# Altium PCB PCB1.PcbDoc
Units mm, origin at the board's own origin, x right, y up, seen from the top; angles counter-clockwise.
Board outline 49.91 x 65.28 mm, 4 copper layers (Top Layer, Layer 1, Layer 2, Bottom Layer), stack 0.603 mm thick; 73 components, 88 nets, 357 pads, 0 vias.
Unrouted connection lines stored in the file: 222.
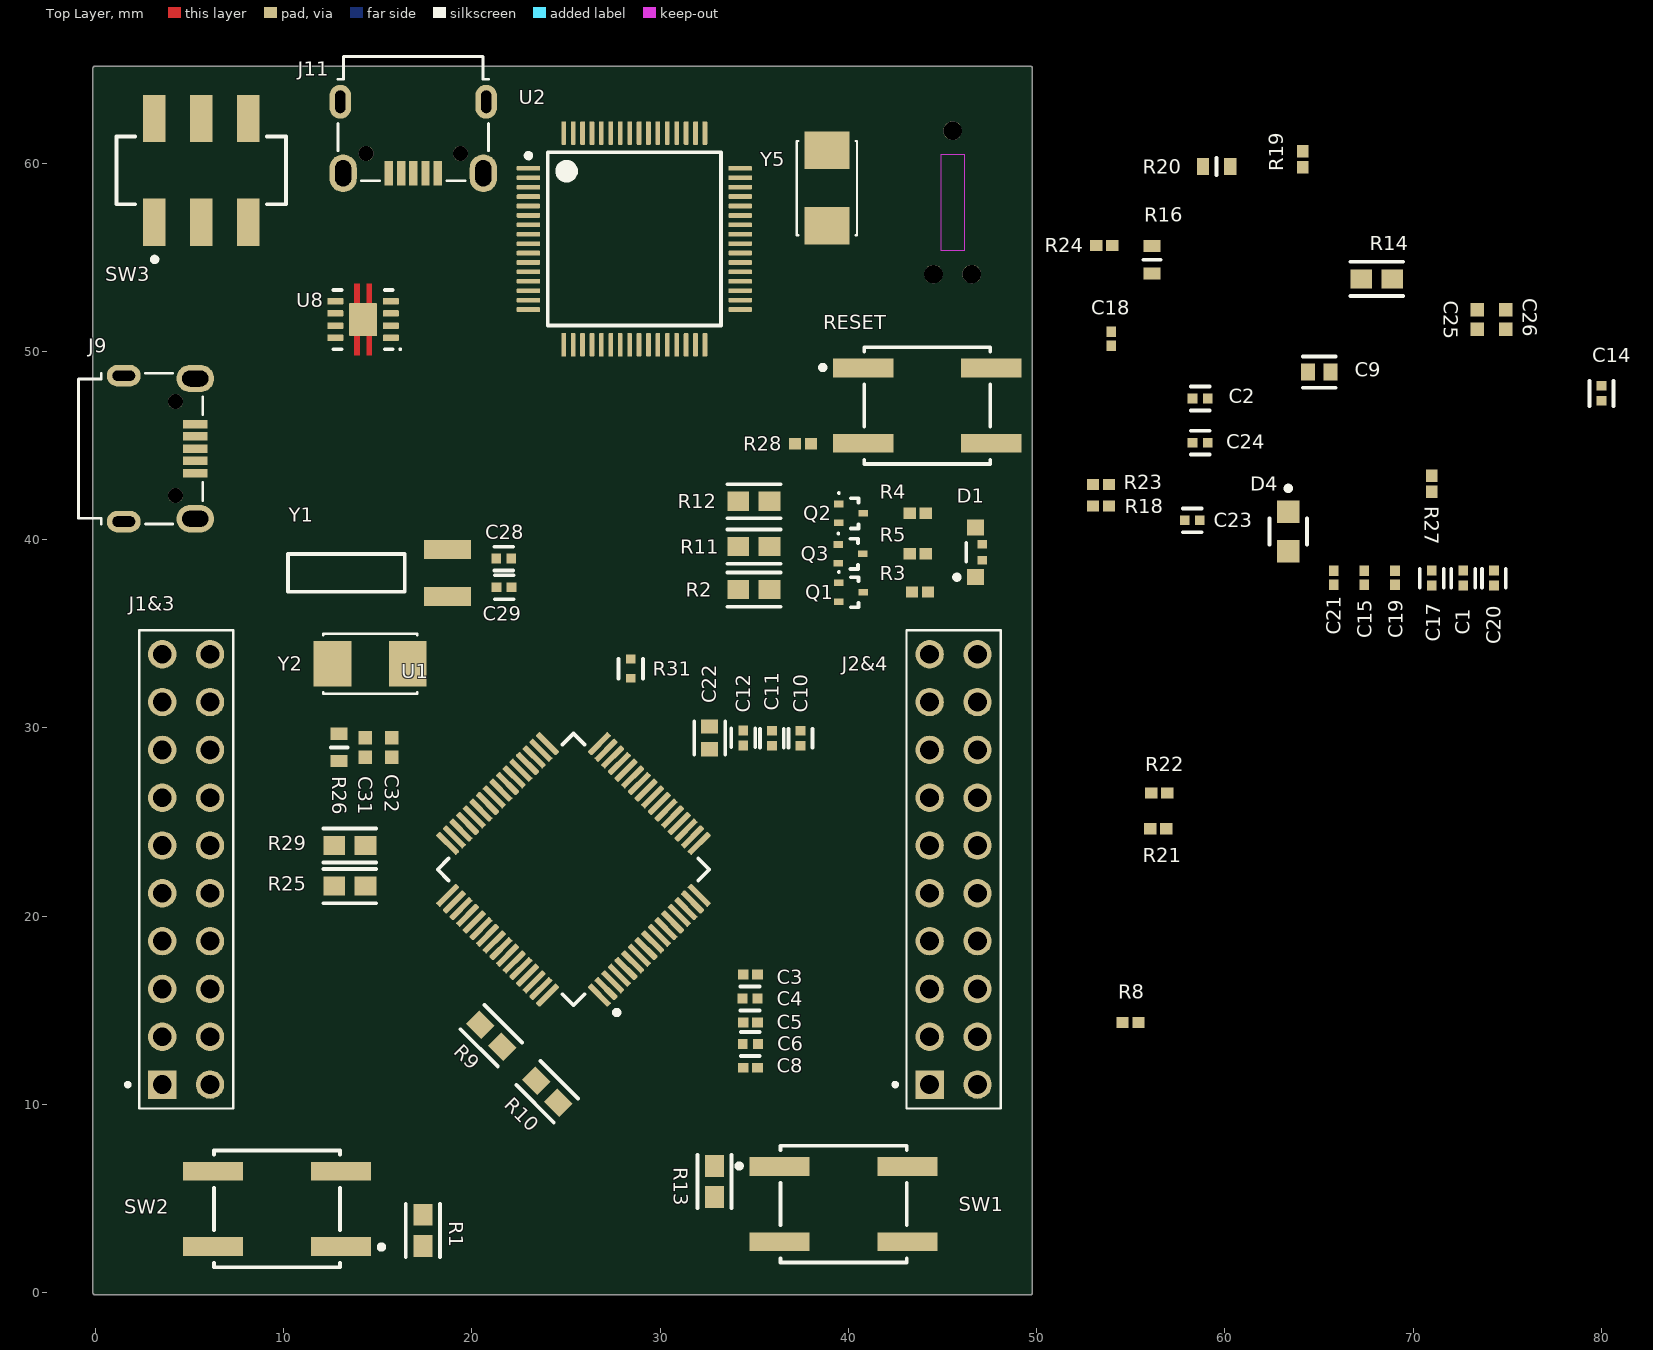
[diagram p0: Top Layer view]
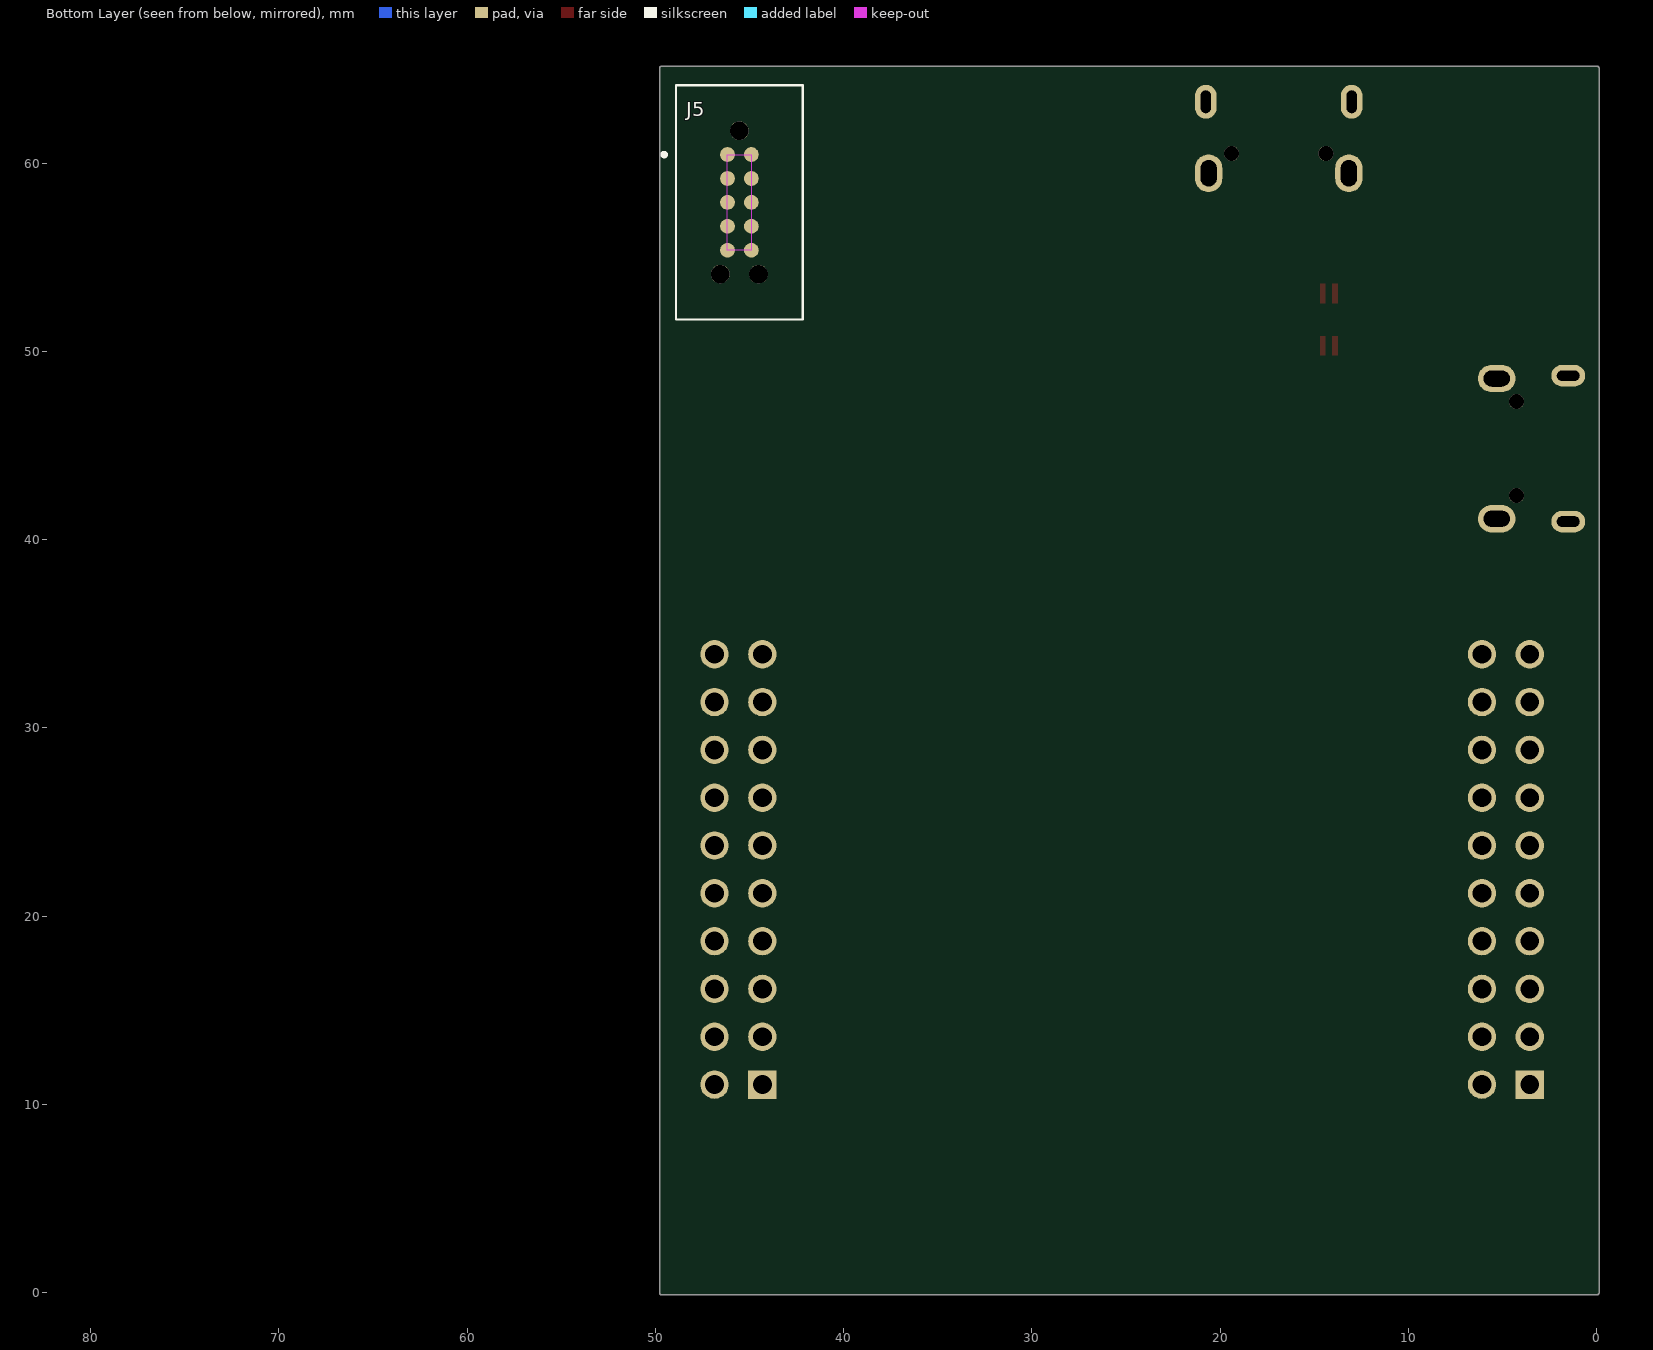
[diagram p1: Bottom Layer view, seen from below]

## Layer stack, top to bottom
Top Solder: solder mask 0.0102, Solder Resist, Dk 3.5
Top Layer: signal copper 0.0356
Dielectric 2: prepreg 0.0711, PP-006, Dk 4.1
Layer 1: signal copper 0.035
Dielectric 1: dielectric 0.32, FR-4, Dk 4.8
Layer 2: signal copper 0.035
Dielectric 3: prepreg 0.0711, PP-006, Dk 4.1
Bottom Layer: signal copper 0.0356
Bottom Solder: solder mask 0.0102, Solder Resist, Dk 3.5

## Board outline
0,-0.127 cw(c0,0) -0.127,0 -0.127,65.024 cw(c0,65.024) 0,65.151 49.657,65.151 cw(c49.657,65.024) 49.784,65.024 49.784,0 cw(c49.657,0) 49.657,-0.127

## Design rules (kind name [scope] priority, off if disabled: settings)
Clearance [All] p1: gap=0.1 ignorepadtopadclearanceinfootprint=FALSE
PolygonConnect [All] p1: connectstyle=Relief reliefconductorwidth=0.254 reliefentries=4 polygonreliefangle="90 Angle" airgapwidth=0.254
RoutingVias [All] p1: holewidth=0.1 width=0.254 viastyle="Through Hole" minholewidth=0.08 minwidth=0.2 maxholewidth=0.125 maxwidth=0.3
SolderMaskExpansion [All] p1: expansion=0.102 istentingtop=FALSE
Width [All] p1: maxlimit=0.254 minlimit=0.254 preferedwidth=0.254
30 further rules are at their usual default settings.

## Components (designator, comment, footprint, x,y, rotation, side; value= is the part's Value field where it differs from the comment)
C1 "0.1uF" FP-C0402-BB-MFG 72.668,37.954 r270 top value="0.10 μF"
C2 "0.1uF" FP-C0402-BB-MFG 58.693,47.498 r0 top value="0.10 μF"
C3 "0.01uF" CAPC1005X55X30LL05T10 34.798,16.891 r180 top
C4 "0.1uF" FP-C0402-BB-MFG 34.779,15.621 r0 top value="0.10 μF"
C5 "0.01uF" CAPC1005X55X30LL05T10 34.798,14.351 r180 top
C6 "0.1uF" FP-C0402-BB-MFG 34.798,13.208 r0 top value="0.10 μF"
C8 "0.01uF" CAPC1005X55X30LL05T10 34.798,11.938 r180 top
C9 "2.2uF" FP-C0603C225K4PACTU-MFG 65.024,48.895 r0 top
C10 "0.1uF" FP-C0402-BB-MFG 37.465,29.445 r90 top value="0.10 μF"
C11 "0.1uF" FP-C0402-BB-MFG 35.941,29.445 r90 top value="0.10 μF"
C12 "0.1uF" FP-C0402-BB-MFG 34.417,29.464 r90 top value="0.10 μF"
C14 "C0402C105K8PACTU" FP-C0402C105K8PACTU-MFG 80.01,47.771 r270 top
C15 "0.01uF" CAPC1005X55X30LL05T10 67.413,37.973 r90 top
C17 "0.1uF" FP-C0402-BB-MFG 70.993,37.954 r270 top value="0.10 μF"
C18 "C0402C103K5RACTU" CAPC1005X55X30LL05T10 53.975,50.672 r270 top
C19 "0.01uF" CAPC1005X55X30LL05T10 69.04,37.973 r90 top
C20 "0.1uF" FP-C0402-BB-MFG 74.295,37.954 r270 top value="0.10 μF"
C21 "0.01uF" CAPC1005X55X30LL05T10 65.786,37.974 r90 top
C22 "2.2uF" FP-C0603C225K4PACTU-MFG 32.639,29.464 r90 top
C23 "0.1uF" FP-C0402-BB-MFG 58.274,41.021 r0 top value="0.10 μF"
C24 "0.1uF" FP-C0402-BB-MFG 58.693,45.149 r0 top value="0.10 μF"
C25 "10pF" CAPC1005X55X25ML05T05 73.406,51.689 r90 top
C26 "10pF" CAPC1005X55X25ML05T05 74.93,51.689 r90 top
C28 "24pF" FP-C0402-BB-MFG 21.698,38.989 r0 top value="24 pF"
C29 "24pF" FP-C0402-BB-MFG 21.717,37.465 r180 top value="24 pF"
C31 "10pF" CAPC1005X55X25ML05T05 14.351,28.954 r90 top
C32 "10pF" CAPC1005X55X25ML05T05 15.748,28.954 r90 top
D1 "HSMF-C113" AVAG-HSMF-C11X_H1_V 46.767,39.326 r90 top
D4 "LTST-C170AKT" FP-LTST-C170AKT-MFG 63.373,40.42 r270 top
J1&3 "1-826656-0" TE_1-826656-0 4.826,22.479 r90 top
J2&4 "1-826656-0" TE_1-826656-0 45.593,22.479 r90 top
J5 "TC2050-IDC-NL" TAG-CONNECT_TC2050-IDC-NL 46.176,60.452 r180 bottom net-tie
J9 "629105150521" 629105150521 2.413,44.831 r270 top
J11 "629105150521" 629105150521 16.891,62.357 r180 top
Q1 "DTC114EET1G" ONSC-SC-75-3-463-01_V 40.144,37.203 r0 top
Q2 "DTC114EET1G" ONSC-SC-75-3-463-01_V 40.144,41.394 r0 top
Q3 "DTC114EET1G" ONSC-SC-75-3-463-01_V 40.119,39.243 r0 top
R1 "CR0603-JW-102ELF" FP-CR0603-IPC_A 17.399,3.302 r270 top
R2 "CR0603-JW-102ELF" FP-CR0603-IPC_A 34.987,37.338 r0 top
R3 "CR0402-FX-3300GLF" RESC1005X40X25NL10T10 43.815,37.211 r0 top
R4 "CR0402-FX-3300GLF" RESC1005X40X25NL10T10 43.688,41.402 r0 top
R5 "CR0402-FX-3300GLF" RESC1005X40X25NL10T10 43.688,39.243 r0 top
R8 "CR0402-FX-3300GLF" RESC1005X40X25NL10T10 54.991,14.351 r0 top
R9 "CR0603-JW-102ELF" FP-CR0603-IPC_A 21.032,13.639 r315 top
R10 "CR0603-JW-102ELF" FP-CR0603-IPC_A 24.003,10.668 r315 top
R11 "CR0603-JW-102ELF" FP-CR0603-IPC_A 34.987,39.624 r0 top
R12 "CR0603-JW-102ELF" FP-CR0603-IPC_A 34.987,42.037 r0 top
R13 "CR0603-JW-102ELF" FP-CR0603-IPC_A 32.893,5.904 r90 top
R14 "CR0603-JW-102ELF" FP-CR0603-IPC_A 68.072,53.848 r180 top
R16 "0" FP-CR0603-MFG 56.134,54.864 r90 top
R18 "10k" RESC1005X40X25NL10T10 53.423,41.783 r0 top
R19 "CR0402-FX-1002GLF" RESC1005X40X25NL10T10 64.135,60.198 r90 top
R20 "0" FP-CR0603-MFG 59.563,59.817 r180 top
R21 "10k" RESC1005X40X25NL10T10 56.471,24.638 r0 top
R22 "10k" RESC1005X40X25NL10T10 56.515,26.543 r0 top
R23 "10k" RESC1005X40X25NL10T10 53.423,42.926 r0 top
R24 "330" RESC1005X40X25NL10T10 53.594,55.626 r0 top
R25 "CR0603-JW-102ELF" FP-CR0603-IPC_A 13.524,21.59 r0 top
R26 "CR0603-J/-000ELF" FP-CR0603-MFG 12.954,28.956 r270 top
R27 "CR0402-FX-3300GLF" RESC1005X40X25NL10T10 70.993,42.97 r270 top
R28 "10k" RESC1005X40X25NL10T10 37.592,45.085 r0 top
R29 "CR0603-JW-102ELF" FP-CR0603-IPC_A 13.524,23.749 r180 top
R31 "1M" FP-CR0402-MFG 28.448,33.147 r90 top
RESET "EVQ-Q2B02W" FP-EVQ-Q2B02W-MFG 44.196,47.117 r0 top
SW1 "EVQ-Q2B02W" FP-EVQ-Q2B02W-MFG 39.751,4.699 r0 top
SW2 "EVQ-Q2B02W" FP-EVQ-Q2B02W-MFG 9.652,4.445 r180 top
SW3 "JS202011SCQN" FP-JS202011SCQN-MFG 5.628,59.607 r0 top
U1 "TM4C123GH6PMI7" FP-PM0064A-MFG 25.4,22.479 r135 top
U2 "TM4C123GH6PMI" PM0064A_L 28.635,55.97 r0 top
U8 "TPS73633DRBR" DRB0008A_V 14.224,51.689 r180 top
Y1 "32.7680KHZ" FP-AB26TRB-MFG 13.335,38.227 r0 top
Y2 "16MHZ" XTAL_NX5032GA-16.000000MHZ-LN-CD-1 14.605,33.401 r0 top
Y5 "16MHZ" XTAL_NX5032GA-16.000000MHZ-LN-CD-1 38.862,58.674 r270 top

## Footprints (in the part's own frame and the unit in brackets; to place one, negate y for a bottom-side part, rotate by r counter-clockwise, add the part's x,y. Pads: shape width x height; smd on the part's side, far side on the other; paste and mask are expansions set on the pad)
629105150521 [mm] "Micro USB 2.0 SMT Type B Horizontal 5 Contacts High Current"
  rect 0.45x1.3 smd: 1(-1.3,2.9) 2(-0.65,2.9) 3(0,2.9) 4(0.65,2.9) 5(1.3,2.9)
  round 0.8 hole 0.8 unplated: MH1(-2.5,1.85) MH2(2.5,1.85)
  oval 1.15x1.8 hole 0.55 slot 1.2 at 90 deg: Shell(-3.875,-0.9) Shell(3.875,-0.9)
  oval 1.45x2 hole 0.85 slot 1.4 at 90 deg: Shell(-3.725,2.9) Shell(3.725,2.9)
  silkscreen extent -4,-3.3 4,3.3, body extent -4,-3.3 4,3.3, height 2.75
AVAG-HSMF-C11X_H1_V [mm] "SMD, 4-Leads, Body 2.5x1mm"
  rect 0.85x0.9 smd: 1(-1.325,0) 4(1.325,0)
  rect 0.45x0.5 smd: 2(-0.425,-0.35) 3(0.425,-0.35)
  silkscreen extent -1.45,0.5 0.5,1.12, body extent -1.25,-0.5 1.25,0.5, height 1
CAPC1005X55X25ML05T05 [mm] "Chip Capacitor, 2-Leads, Body 1.00x0.50mm, IPC Low Density"
  rect 0.72x0.72 smd: 1(-0.51,0) 2(0.51,0)
  body extent -0.53,-0.28 0.53,0.27, height 0.55
CAPC1005X55X30LL05T10 [mm] "Chip Capacitor, 2-Leads, Body 1.00x0.50mm, IPC High Density"
  rect 0.56x0.52 smd: 1(-0.38,0) 2(0.38,0)
  body extent -0.53,-0.28 0.53,0.28, height 0.55
DRB0008A_V [mm] "SON, 8-Leads, Body 3x3mm, Pitch 0.65mm, Thermal Pad 1.50 x 3.8mm"
  rrect29% 0.85x0.35 smd: 1(-1.475,0.975) 2(-1.475,0.325) 3(-1.475,-0.325) 4(-1.475,-0.975) 5(1.475,-0.975) 6(1.475,-0.325) 7(1.475,0.325) 8(1.475,0.975)
  rrect7% 1.5x1.75 smd: 9(0,0)
  Top Layer region: 0.185,0.875 0.185,1.9 0.465,1.9 0.465,0.875
  Top Layer region: -0.185,-0.875 -0.185,-1.9 -0.465,-1.9 -0.465,-0.875
  Top Layer region: 0.185,-0.875 0.185,-1.9 0.465,-1.9 0.465,-0.875
  Top Layer region: -0.185,0.875 -0.185,1.9 -0.465,1.9 -0.465,0.875
  silkscreen extent -2.02,-1.58 1.58,1.62, body extent -1.5,-1.5 1.5,1.5, height 1
FP-AB26TRB-MFG [mm]
  rect 2.5x1 smd paste+0 mask+0: 1(5.375,1.25) 2(5.375,-1.25)
  silkscreen extent -3.1,-1 3.1,1, body extent -3.2,-1.85 6.73,1.85, height 0.25
FP-C0402-BB-MFG [mm]
  rect 0.52x0.52 smd paste+0 mask+0: 1(-0.4,0) 2(0.4,0)
  silkscreen extent -0.5,-0.64 0.5,0.64, body extent -0.8,-0.4 0.8,0.4, height 0.25
FP-C0402C105K8PACTU-MFG [mm]
  rect 0.52x0.52 smd paste+0 mask+0: 1(-0.4,0) 2(0.4,0)
  silkscreen extent -0.67,-0.64 0.67,0.64, body extent -0.8,-0.4 0.8,0.4, height 0.25
FP-C0603C225K4PACTU-MFG [mm]
  rect 0.75x0.9 smd paste+0 mask+0: 1(-0.6,0) 2(0.6,0)
  silkscreen extent -0.87,-0.82 0.87,0.82, body extent -1.2,-0.6 1.2,0.6, height 0.25
FP-CR0402-MFG [mm]
  rect 0.475x0.5 smd paste+0 mask+0: 1(-0.513,0) 2(0.513,0)
  silkscreen extent -0.53,-0.65 0.53,0.65, body extent -0.85,-0.38 0.85,0.38, height 0.25
FP-CR0603-IPC_A [mm]
  rect 1.158x1.012 smd paste+0 mask+0: 1(-0.827,0) 2(0.827,0)
  silkscreen extent -1.41,-0.91 1.41,0.91, body extent -1.91,-1.01 1.91,1.01, height 0.25
FP-CR0603-MFG [mm]
  rect 0.65x0.9 smd paste+0 mask+0: 1(-0.725,0) 2(0.725,0)
  silkscreen extent 0,-0.45 0,0.45, body extent -1.15,-0.55 1.15,0.55, height 0.25
FP-EVQ-Q2B02W-MFG [mm]
  rect 3.2x1 smd paste+0 mask+0: A(-3.4,2) A'(3.4,2) B(-3.4,-2) B'(3.4,-2)
  silkscreen extent -5.67,-3.1 3.35,3.1, body extent -5.1,-3.2 5.1,3.2, height 0.25
FP-JS202011SCQN-MFG [mm]
  rect 1.2x2.5 smd paste+0 mask+0: 1(-2.5,-2.75) 2(0,-2.75) 3(2.5,-2.75) 4(-2.5,2.75) 5(0,2.75) 6(2.5,2.75)
  silkscreen extent -4.5,-4.85 4.5,1.8, body extent -4.6,-4.1 4.6,4.1, height 0.25
FP-LTST-C170AKT-MFG [mm]
  rect 1.2x1.2 smd paste+0 mask+0: 1(-1.05,0) 2(1.05,0)
  silkscreen extent -2.42,-1 0.7,1, body extent -1.75,-0.77 1.75,0.77, height 0.25
FP-PM0064A-MFG [mm]
  rrect33% 1.5x0.3 smd paste+0 mask+0: 1(-5.7,3.75) 2(-5.7,3.25) 3(-5.7,2.75) 4(-5.7,2.25) 5(-5.7,1.75) 6(-5.7,1.25) 7(-5.7,0.75) 8(-5.7,0.25) 9(-5.7,-0.25) 10(-5.7,-0.75) 11(-5.7,-1.25) 12(-5.7,-1.75) 13(-5.7,-2.25) 14(-5.7,-2.75) 15(-5.7,-3.25) 16(-5.7,-3.75) 33(5.7,-3.75) 34(5.7,-3.25) 35(5.7,-2.75) 36(5.7,-2.25) 37(5.7,-1.75) 38(5.7,-1.25) 39(5.7,-0.75) 40(5.7,-0.25) 41(5.7,0.25) 42(5.7,0.75) 43(5.7,1.25) 44(5.7,1.75) 45(5.7,2.25) 46(5.7,2.75) 47(5.7,3.25) 48(5.7,3.75)
  rrect33% 0.3x1.5 smd paste+0 mask+0: 17(-3.75,-5.7) 18(-3.25,-5.7) 19(-2.75,-5.7) 20(-2.25,-5.7) 21(-1.75,-5.7) 22(-1.25,-5.7) 23(-0.75,-5.7) 24(-0.25,-5.7) 25(0.25,-5.7) 26(0.75,-5.7) 27(1.25,-5.7) 28(1.75,-5.7) 29(2.25,-5.7) 30(2.75,-5.7) 31(3.25,-5.7) 32(3.75,-5.7) 49(3.75,5.7) 50(3.25,5.7) 51(2.75,5.7) 52(2.25,5.7) 53(1.75,5.7) 54(1.25,5.7) 55(0.75,5.7) 56(0.25,5.7) 57(-0.25,5.7) 58(-0.75,5.7) 59(-1.25,5.7) 60(-1.75,5.7) 61(-2.25,5.7) 62(-2.75,5.7) 63(-3.25,5.7) 64(-3.75,5.7)
  silkscreen extent -7.12,-5.1 5.1,5.1, body extent -6.55,-6.55 6.55,6.55, height 0.25
ONSC-SC-75-3-463-01_V [mil] "SOT23, 3-Leads, Body 1.6x0.8mm, Pitch 0.5mm"
  rect 20x14.02 smd: 1(-25.49,19.68) 2(-25.49,-19.69) 3(25.49,0)
  silkscreen extent -27,-31 16,44, body extent -16,-31 16,31, height 35
PM0064A_L [mm] "QFP, 64-Leads, Body 10x10mm, Pitch 0.5mm, IPC High Density"
  rrect40% 1.25x0.25 smd: 1(-5.625,3.75) 2(-5.625,3.25) 3(-5.625,2.75) 4(-5.625,2.25) 5(-5.625,1.75) 6(-5.625,1.25) 7(-5.625,0.75) 8(-5.625,0.25) 9(-5.625,-0.25) 10(-5.625,-0.75) 11(-5.625,-1.25) 12(-5.625,-1.75) 13(-5.625,-2.25) 14(-5.625,-2.75) 15(-5.625,-3.25) 16(-5.625,-3.75) 33(5.625,-3.75) 34(5.625,-3.25) 35(5.625,-2.75) 36(5.625,-2.25) 37(5.625,-1.75) 38(5.625,-1.25) 39(5.625,-0.75) 40(5.625,-0.25) 41(5.625,0.25) 42(5.625,0.75) 43(5.625,1.25) 44(5.625,1.75) 45(5.625,2.25) 46(5.625,2.75) 47(5.625,3.25) 48(5.625,3.75)
  rrect40% 0.25x1.25 smd: 17(-3.75,-5.625) 18(-3.25,-5.625) 19(-2.75,-5.625) 20(-2.25,-5.625) 21(-1.75,-5.625) 22(-1.25,-5.625) 23(-0.75,-5.625) 24(-0.25,-5.625) 25(0.25,-5.625) 26(0.75,-5.625) 27(1.25,-5.625) 28(1.75,-5.625) 29(2.25,-5.625) 30(2.75,-5.625) 31(3.25,-5.625) 32(3.75,-5.625) 49(3.75,5.625) 50(3.25,5.625) 51(2.75,5.625) 52(2.25,5.625) 53(1.75,5.625) 54(1.25,5.625) 55(0.75,5.625) 56(0.25,5.625) 57(-0.25,5.625) 58(-0.75,5.625) 59(-1.25,5.625) 60(-1.75,5.625) 61(-2.25,5.625) 62(-2.75,5.625) 63(-3.25,5.625) 64(-3.75,5.625)
  silkscreen extent -5.75,-4.6 4.6,4.6, body extent -6,-6 6,6, height 1.49
RESC1005X40X25NL10T10 [mm] "Chip Resistor, 2-Leads, Body 1.00x0.50mm, IPC Medium Density"
  rect 0.65x0.6 smd: 1(-0.425,0) 2(0.425,0)
  body extent -0.55,-0.3 0.55,0.3, height 0.4
TAG-CONNECT_TC2050-IDC-NL [mm]
  round 0.787 smd paste-1: 1(0,0) 2(0,-1.27) 3(0,-2.54) 4(0,-3.81) 5(0,-5.08) 6(1.27,-5.08) 7(1.27,-3.81) 8(1.27,-2.54) 9(1.27,-1.27) 10(1.27,0)
  round 0.991 hole 0.991 unplated: ""(-0.38,-6.35) ""(0.635,1.27) ""(1.65,-6.35)
  Keep-Out Layer region: 1.27,-5.08 0,-5.08 0,0 1.27,0
  Keep-Out Layer region: 1.27,-5.08 0,-5.08 0,0 1.27,0
  silkscreen extent -3.46,-8.76 4,3.68
TE_1-826656-0 [mm]
  rect 1.508x1.508 hole 1: 1(-11.43,1.27)
  round 1.508 hole 1: 2(-8.89,1.27) 3(-6.35,1.27) 4(-3.81,1.27) 5(-1.27,1.27) 6(1.27,1.27) 7(3.81,1.27) 8(6.35,1.27) 9(8.89,1.27) 10(11.43,1.27) 11(-11.43,-1.27) 12(-8.89,-1.27) 13(-6.35,-1.27) 14(-3.81,-1.27) 15(-1.27,-1.27) 16(1.27,-1.27) 17(3.81,-1.27) 18(6.35,-1.27) 19(8.89,-1.27) 20(11.43,-1.27)
  silkscreen extent -12.7,-2.5 12.7,3.2, body extent -12.7,-2.5 12.7,2.5, height 6.01
XTAL_NX5032GA-16.000000MHZ-LN-CD-1 [mm]
  rect 2x2.4 smd: 1(-2,0) 2(2,0)
  silkscreen extent -2.5,-1.6 2.5,1.6, body extent -2.5,-1.6 2.5,1.6, height 1.51

## Part data
C1 C2 C4 C6 C10 C11 C12 C17 C20 C23 C24: library part CMP-1034-02068-3, "CAP CER 0.1UF 16V 5% X7R 0402", Capacitance="0.10 μF", Manufacturer=Kemet, Manufacturer Part Number=C0402C104J4RACTU, Package=C0402-BB, Temperature="-55°C to +125°C", Temperature Characteristic=X7R, Temperature Coefficient=15%, Temperature Range High=+125°C, Temperature Range Low=-55°C, Tolerance=0.05, Voltage Rating="16 V", Automotive=No, Category=Cap, ComponentLink2Description=Datasheet, ComponentLink2URL=https://content.kemet.com/datasheets/KEM_C1002_X7R_SMD.pdf, Device Class L1="Passive Components", Device Class L2=Capacitors, Device Class L3="Ceramic Capacitors", Digikey Description="CAP CER 0.1UF 16V 5% X7R 0402", Height=0.55mm, Ipc Land Pattern Name=CAPC10050X50, Lead Free=Yes, Material=Ceramic, Mouser Description="CAP CER 0.1UF 16V X7R 0402", Octopart=https://octopart.com/c0402c104j4ractu-kemet-12573893, RoHS=TRUE
C3 C5 C8 C15 C19 C21: library part CMP-1034-01886-2, Manufacturer=Kemet, Part Number=C0402C103K5RACTU
C9 C22: library part CMP-2006-02259-2, "CAP CER 2.2UF 16V X5R 0603", Case Code (Imperial)=0603, Case Code (Metric)=1608, Dielectric=X5R, Dielectric Material=Ceramic, Max Operating Temperature=85°C, Min Operating Temperature=-55°C, Package Quantity=1, Tolerance=10%, Voltage=16V, Capacitance=2.2uF, Case/Package=0603, Construction=Flat, Contact Plating=Tin, Depth=0.8mm, Dissipation Factor=5%, Height=0.8mm, Lead Free="Lead Free", Length=1.6mm, Mount="Surface Mount", Number of Pins=2, Packaging="Tape and Reel", Radiation Hardening=No, REACH SVHC="No SVHC", RoHS Compliant=Yes, Series=C, Termination=SMD/SMT, Thickness=0.034inch, Voltage Rating=16V, Voltage Rating (DC)=16V, Width=0.8mm
C14: library part CMP-2008-02081-2, "CAP CER 1UF 10V X5R 0402", Capacitance=1uF, Case Code (Imperial)=0402, Case Code (Metric)=1005, Dielectric=X5R, Dielectric Material=Ceramic, Max Operating Temperature=85°C, Min Operating Temperature=-55°C, Package Quantity=1, Tolerance=10%, Voltage=10V, Case/Package=0402, Construction=Flat, Contact Plating=Tin, Depth=0.5mm, Dissipation Factor=5%, Height=0.5mm, Lead Free="Lead Free", Length=1mm, Mount="Surface Mount", Number of Pins=2, Packaging="Tape and Reel", Radiation Hardening=No, REACH SVHC="No SVHC", RoHS Compliant=Yes, Series=C, Termination=SMD/SMT, Thickness=0.022inch, Voltage Rating=10V, Voltage Rating (DC)=10V, Width=0.5mm
C18: library part CMP-1034-01886-2, Manufacturer=Kemet, Part Number=C0402C103K5RACTU
C25 C26 C31 C32: library part CMP-2100-03589-1, "Chip Capacitor, 10 pF, +/- 5%, 50 V, -55 to 125 degC, 0402 (1005 Metric), RoHS, Tape and Reel", Case Code (Imperial)=0402, Case Code (Metric)=1005, Dielectric=C0G, Dielectric Material=Ceramic, Insulation Resistance=100GR, Manufacturer=Yageo, Max Operating Temperature=125degC, Min Operating Temperature=-55degC, Package Description="2-Pin Surface Mount Device, Body 1 x 0.5 mm", Package Quantity=1, Temperature Coefficient=30ppm/degC, Tolerance=5%, Voltage=50V, Capacitance=10pF, Case/Package=0402, Composition=Ceramic, Datasheet URL=http://www.yageo.com/documents/recent/UPY-GP_NP0_16V-to-50V_14.pdf, Datasheet Version="Rev. 14, 07/2016", Depth=0.5mm, Height=0.5mm, Lead Free=LeadFree, Length=1mm, Manufacturer URL=http://www.yageo.com/, Mount=SurfaceMount, Number of Pins=2, Package Reference=0402, Packaging=TapeandReel, Radiation Hardening=No, REACH SVHC=NoSVHC, RoHSCompliant=True, Termination=SMD/SMT, Thickness=0.022inch, Voltage Rating=50V, Voltage Rating (DC)=50V, Width=0.02inch
C28 C29: library part CMP-1034-00941-3, Capacitance="24 pF", Manufacturer=Kemet, Manufacturer Part Number=C0402C240J5GACTU, Package=C0402-BB, Temperature="-55°C to +125°C", Temperature Characteristic=C0G, Temperature Coefficient=15%, Temperature Range High=+125°C, Temperature Range Low=-55°C, Tolerance=0.05, Voltage Rating="50 V", Automotive=No, Category=Cap, ComponentLink2Description=Datasheet, ComponentLink2URL=https://content.kemet.com/datasheets/KEM_C1002_X7R_SMD.pdf, Device Class L1="Passive Components", Device Class L2=Capacitors, Device Class L3="Ceramic Capacitors", Digikey Description="CAP CER 24PF 50V 5% NP0 0402", Height=0.55mm, Ipc Land Pattern Name=CAPC10050X50, Lead Free=Yes, Material=Ceramic, Mouser Description="Multilayer Ceramic Capacitors MLCC - SMD/SMT 50volts 24pF C0G 5%", Octopart=https://octopart.com/c0402c240j5gactu-kemet-9138560, RoHS=TRUE
D1: library part CMP-2000-06422-1, "Right Angle Tricolor Surface Mount Chip LED, Red/Green/Blue, -40 to 85 degC, 4-Pin SMD, RoHS, Tape and Reel", Forward Current=20mA, Forward Voltage=3.9/2.6/2V, Manufacturer=Avago, Operating Temp Range=-40Cto85C, Operating Temperature Classification=Industrial, Package Description="4-Pin Surface Mount Device, Body 2.5 x 1 mm", Package Reference=HSMF-C11X, Package Type=ChipLed, Power Dissipation=59/39/36W, Reverse Voltage=5V, Datasheet URL=https://datasheet.ciiva.com/15117/getdatasheetpartid-133115-15117679.pdf, Datasheet Version=04/2010, DELETED=Compliant, Dominant Wave Length=470/572/626nm, High Brightness=Yes, Lens Dimensions=2.1x1x0.5mm, Lens Type=ColorlessDiffused, Lum Intensity=60/50/80mcd, Luminous Intensity=60/50/80mcd, Main Category=ChipLED, Manufacturer URL=http://www.avagotech.com/, Mounting=SurfaceMount, Mounting Technology=SurfaceMount, Number of  Elements=3, Packaging=TapeandReel, Peak Wavelength=468/570/637nm, Pin Count=4, Product Depth (mm)=1mm, Product Height (mm)=1mm, Product Length (mm)=2.5mm, Rad Hardened=No, Shape Type=Rectangular, Test Current (It)=20mA, Type=Tri-Color, Viewing Angle=125/125/120deg
D4: library part CMP-22017-000022-1, "LED ORANGE CLEAR SMD", Case Code (Imperial)=0805, Case Code (Metric)=2012, Color=Orange, Forward Current=30mA, Forward Voltage=2.1V, Lens Color=Colorless, Max Operating Temperature=85°C, Max Power Dissipation=100mW, Min Operating Temperature=-55°C, Package Quantity=1, Reverse Voltage=5V, Test Current=10mA, Case/Package=0805, Depth=1.25mm, Dominant Wavelength=602nm, Height=1.1mm, Illumination Color=Orange, Lead Free="Lead Free", Length=2mm, Lens Style=Diffused, Lens Transparency=Clear, Luminous Intensity=2mcd, Mount="Surface Mount", Number of Elements=1, Number of LEDs=1, Number of Pins=2, Packaging="Tape and Reel", Power Dissipation=100mW, Radiation Hardening=No, Viewing Angle=130°, Wavelength=610nm, Width=1.25mm
J1&3 J2&4: "Conn Unshrouded Header HDR 20 POS 2.54mm Solder ST Thru-Hole Box", Package=None, Availability=Good, Check_prices=https://www.snapeda.com/parts/1-826656-0/TE%20Connectivity%20AMP%20Connectors/view-part/2881856/?ref=eda, MF="TE Connectivity", MP=1-826656-0, Price=None, Purchase-URL=https://pricing.snapeda.com/search/part/1-826656-0/?ref=eda, SnapEDA_Link=https://www.snapeda.com/parts/1-826656-0/TE%20Connectivity%20AMP%20Connectors/view-part/2881856/?ref=snap
J5: "MSP-FET430 Flash Emulation Tool Plug-Of-Nailsâ„¢ Adapter Cable", Package=None, Availability="In Stock", Check_prices=https://www.snapeda.com/parts/TC2050-IDC-NL/Tag-Connect+LLC/view-part/?ref=eda, MF="Tag-Connect LLC", MP=TC2050-IDC-NL, Price=None, Purchase-URL=https://pricing.snapeda.com/search/part/TC2050-IDC-NL/?ref=eda, SnapEDA_Link=https://www.snapeda.com/parts/TC2050-IDC-NL/Tag-Connect+LLC/view-part/?ref=snap
J9 J11: library part CMP-1502-03252-3, Contact Resistance=30mΩ, Current Rating=3A, Insulation Resistance=1GΩ, Max Operating Temperature=85°C, Min Operating Temperature=-40°C, Operating Supply Voltage=30V, Connector Type=USB, Contact Material=Gold, Contact Plating=Gold, Features=Shielded, Gender=Receptacle, Height=2.86mm, Lead Free="Lead Free", Mount="Horizontal, Surface Mount", NexarPartId=52645113, Number of Contacts=5, Number of Pins=5, Orientation=Horizontal, Packaging="Tape and Reel", REACH SVHC=Unknown, RoHS=Compliant, Termination=SMD/SMT, USB Standard="USB 2.0", Voltage Rating=30V
Q1 Q2 Q3: library part CMP-0630-00210-1, "Digital Transistor (BRT), R1=10 kOhm, R2=10 kOhm, NPN Transistor, 3-Pin SC-75, Pb-Free, Tape and Reel", Manufacturer="On Semiconductor", ComponentLink1Description="Manufacturer URL", ComponentLink1URL=http://www.onsemi.com/, ComponentLink2Description=Datasheet, ComponentLink2URL=http://www.onsemi.cn/pub_link/Collateral/DTC114E-D.PDF, ComponentLink3Description="Package Specification", ComponentLink3URL=http://www.onsemi.com/pub_link/Collateral/463-01.PDF, DatasheetVersion="Rev. 5", hFE Min=35, IC Continuous (A)=0.1, Mounting Technology="Surface Mount", PackageDescription="3-Pin Small Outline Transistor, Body 1.6 x 0.8 mm, Pitch 0.5 mm", PackageReference=SC-75-3-463-01, PackageVersion="Rev. F, 07/2005", Packing="Tape and Reel", PartNumber=DTC114EET1G, Polarity=NPN, R1/R2 Typ=1, RoHS=TRUE, V(BR)CEO Min (V)=50
R1 R2 R9 R10 R11 R12 R13 R14 R25 R29: library part CMP-07231-000375-1, "Thick Film Chip Resistors 0603 1kΩ 0.1W 5% 200ppm/°C", Case Code (Imperial)=0603, Case Code (Metric)=1608, Max Operating Temperature=155°C, Max Power Dissipation=100mW, Min Operating Temperature=-55°C, Package Quantity=5000, Resistance=1kR, Temperature Coefficient=200ppm/°C, Tolerance=5%, Voltage Rating=50V, Case/Package=0603, Composition="Thick Film", Contact Plating=Tin, Depth=0.8mm, Features="Moisture Resistant", Height=0.022inch, Length=1.6mm, Military Standard=Not, Mount="Surface Mount", Number of Pins=2, Number of Terminations=2, Packaging="Tape and Reel", Power Rating=100mW, Radiation Hardening=No, REACH SVHC="No SVHC", Termination=SMD/SMT, Thickness=457um, Voltage Rating (DC)=50V, Width=0.8mm
R3 R4 R5 R8 R27: library part CMP-1011-00454-2, "330", Manufacturer=Bourns, Part Number=CR0402-FX-3300GLF
R16 R20 R26: library part CMP-07231-000023-1, "Thick Film Chip Resistors 0603 0Ω 0.1W 5%", Case Code (Imperial)=0603, Case Code (Metric)=1608, Max Operating Temperature=155°C, Max Power Dissipation=100mW, Min Operating Temperature=-55°C, Package Quantity=5000, Resistance=0mR, Temperature Coefficient=500ppm/°C, Tolerance=1%, Voltage Rating=50V, Case/Package=0603, Composition="Thick Film", Contact Plating=Tin, Depth=0.8mm, Height=0.45mm, Length=1.6mm, Military Standard=Not, Mount="Surface Mount", Number of Pins=2, Packaging="Tape and Reel", Power Rating=100mW, Radiation Hardening=No, REACH SVHC="No SVHC", Termination=SMD/SMT, Thickness=457um, Voltage Rating (DC)=50V, Width=0.8mm
R18 R21 R22 R23 R28: library part CMP-2002-04694-1, Manufacturer=Bourns, Part Number=CR0402-FX-1002GLF
R19: library part CMP-2002-04694-1, Manufacturer=Bourns, Part Number=CR0402-FX-1002GLF
R24: library part CMP-1011-00454-2, Manufacturer=Bourns, Part Number=CR0402-FX-3300GLF
R31: library part CMP-2002-05525-2, "Thick Film Chip Resistors 0402 1MΩ 0.0625W 5% 200ppm/°C", Case Code (Imperial)=0402, Case Code (Metric)=1005, Max Operating Temperature=125°C, Max Power Dissipation=63mW, Min Operating Temperature=-55°C, Package Quantity=10000, Power Rating=62.5mW, Resistance=1MR, Temperature Coefficient=200ppm/°C, Tolerance=5%, Voltage Rating=50V, Case/Package=0402, Composition="Thick Film", Contact Plating=Tin, Depth=0.5mm, Height=0.016inch, Length=1mm, Military Standard=Not, Mount="Surface Mount", Number of Terminations=2, Packaging="Tape and Reel", Radiation Hardening=No, Termination=SMD/SMT, Thickness=356um, Width=0.02inch
RESET SW1 SW2: library part CMP-05618-000078-1, "SWITCH TACTILE SPST-NO 0.02A 15V", Actuator Color=White, Case/Package=SMD/SMT, Contact Current Rating=20mA, Contact Resistance=100mR, Max Operating Temperature=85°C, Max Voltage Rating (DC)=15V, Min Operating Temperature=-40°C, Operating Force=0.5N, Package Quantity=1, Voltage Rating (AC)=250V, Actuator Length=0.7mm, Actuator Type=Standard, Color=White, Contact Plating=Silver, Current Rating=20mA, Electrical Life=2000000Cycles, Illumination Type=Non-Illuminated, Lead Free="Lead Free", Mechanical Life=2000000Cycles, Mount="Surface Mount", Orientation=Straight, Packaging="Tape and Reel", Radiation Hardening=No, RoHS Compliant=Yes, Series=EVQQ2, Size=1.8mm, Switch Function=Off-Mom, Switch Travel=0.2mm, Termination=SMD/SMT, Thickness=1.8mm, Throw Configuration=SPST, Voltage Rating (DC)=15V
SW3: library part CMP-2000-05087-3, "SWITCH SLIDE DPDT 300MA 6V", Actuator Color=Black, Contact Current Rating=300mA, Contact Resistance=70mR, Flammability Rating="UL94 V-2", Max Operating Temperature=85°C, Max Voltage Rating (DC)=6V, Min Operating Temperature=-20°C, Package Quantity=1, Actuator Length=2mm, Actuator Material=Nylon, Actuator Type=Standard, Contact Material="Copper Alloy", Contact Plating=Silver, Current Rating=300mA, Depth=7.5mm, Electrical Life=5000Cycles, Housing Material=Nylon, Lead Free="Lead Free", Length=9mm, Max Current Rating=300mA, Mount="Surface Mount", Orientation=Vertical, Packaging="Tape and Reel", Radiation Hardening=No, REACH SVHC="No SVHC", Series=JS, Switch Function=On-On, Switch Travel=2mm, Termination="Gull Wing", Throw Configuration=DPDT, Voltage Rating (DC)=6V
U1: library part CMP-04869-000012-1, "IC MCU 32BIT 256KB FLASH 64LQFP", Ambient Temperature Range High=+85°C, Ambient Temperature Range Low=-40°C, Frequency=80MHz, Manufacturer="Texas Instruments", Max Junction Temp=+96°C, Max Supply Voltage=3.63V, Min Supply Voltage=1.08V, Package=PM0064A, Temperature="-40°C to +96°C", Automotive=No, Category=IC, ComponentLink2Description=Datasheet, ComponentLink2URL=http://www.ti.com/lit/gpn/tm4c123gh6pm, Core Architecture="ARM Cortex-M4F", Data Bus Width=32bits, Device Class L1="Integrated Circuits (ICs)", Device Class L2="Embedded Processors and Controllers", Device Class L3=Microcontrollers, Digikey Description="IC MCU 32BIT 256KB FLASH 64LQFP", Height=1.6mm, Interface=I2C,SPI,UART,CAN,USB,IrDA,Other, Ipc Land Pattern Name=QFP50P1200X1200X160-64, Lead Free=Yes, Manufacturer Part Number=TM4C123GH6PMI7, Memory Size=256KBytes, Memory Type=FLASH, Mouser Description="MCU 32-Bit Tiva C ARM Cortex M4F RISC 256KB Flash 1.2V/3.3V 64-Pin LQFP", Number Of A/D Converters=2, Number Of Adc Channels=12, Number Of Cores=1, Number Of I2C Channels=4, Number Of I/Os=43, Number Of Pwm Channels=16, Number Of Spi Channels=4, Number Of Timers/Counters=12, Number Of Uart Channels=8, Number Of Usb Channels=1, Octopart=https://octopart.com/tm4c123gh6pmi7-texas+instruments-47641106, Ram Size=32KBytes, RoHS=TRUE, Standoff Height=0.05mm, Temperature Range High=+96°C, Temperature Range Low=-40°C
U2: library part CMP-0945-00006-2, "Tiva C Series Microcontroller, 256 KB Flash, 32 KB SRAM, 12 Bit, 12 Channels, -40 to 85 degC, 64-Pin LQFP (PM), Green (RoHS & no Sb/Br)", Manufacturer="Texas Instruments", Temperature Range="-40 to 85 degC", ADC Channels=12, ADC Resolution="12 Bit", ComponentLink1Description="Manufacturer URL", ComponentLink1URL=http://www.ti.com/, ComponentLink2Description=Datasheet, ComponentLink2URL=http://www.ti.com/lit/ds/symlink/tm4c123gh6pm.pdf, ComponentLink3Description="Package Specification", ComponentLink3URL=http://www.ti.com/litv/pdf/mtqf008a, Data Memory="32 KB", DatasheetVersion="Rev. 15741.2722", GPIOs=43, I2C=2, Max Speed="80 MHz", Mounting Technology="Surface Mount", PackageDescription="64-Pin Plastic Quad Flatpack, Body 10 x 10 mm, Pitch 0.5 mm", PackageReference=PM0064A, PackageVersion=4040152/C, PartNumber=TM4C123GH6PMI, Prefix="Qualified Device", Program Memory="256 KB", RoHS=TRUE, Tiva Series="Connected MCUs", UART=4
U8: library part CMP-0395-00621-2, "Single Output Low Noise LDO, 400 mA, Fixed 3.3 V Output, 1.7 to 5.5 V Input, with Reverse Current Protection, 8-pin SON (DRB), -40 to 85 degC, Green (RoHS & no Sb/Br)", Manufacturer="Texas Instruments", Rating=Catalog, Accuracy(%)=1, ComponentLink1Description="Manufacturer URL", ComponentLink1URL=http://www.ti.com/, ComponentLink2Description=Datasheet, ComponentLink2URL=http://www.ti.com/general/docs/lit/getliterature.tsp?genericPartNumber=TPS73633&fileType=pdf, ComponentLink3Description="Package Specification", ComponentLink3URL=http://www.ti.com/litv/pdf/mpds118h, ComponentLink4Description="URL Link1", ComponentLink4URL="Samples URL:http://www.ti.com/product/tps73633#samples", DatasheetVersion=SBVS038T, Eco-Plan="Green (RoHS & no Sb/Br)", Fixed Output Options(V)=3.3, Iout(Max)(A)=0.4, Iq(Typ)(mA)=0.3, Mounting Technology="Surface Mount", PackageDescription="8-Pin Plastic Small Outline, Body 3 x 3 mm, Pitch 0.65 mm", PackageReference=DRB0008A, PackageVersion=4203482-2/K, PartNumber=TPS73633DRBR, SubFamily="Single Channel LDO", Vdo(Typ)(mV)=75, Vin(Max)(V)=5.5, Vin(Min)(V)=1.7, Vout Adj(Max)(V)=3.3, Vout Adj(Min)(V)=3.3
Y1: library part CMP-27762-006068-1, "CRYSTAL 32.7680KHZ 12.5PF TH", Case/Package=Radial, ESR (Equivalent Series Resistance)=50kR, Frequency=32.768kHz, Frequency Stability=-0.034ppm, Frequency Tolerance=20ppm, Load Capacitance=12.5pF, Max Operating Temperature=85°C, Min Operating Temperature=-40°C, Operating Frequency="32.768 kHz", Package Quantity=500, Depth=1.9mm, Height=0.075inch, Lead Free="Lead Free", Lead Pitch=2.54mm, Length=6mm, Mount="Surface Mount", Number of Pins=2, Packaging="Tape and Reel", REACH SVHC="No SVHC", Series=AB26TRB, Series Resistance=50kR, Termination=Radial, Tolerance=20ppm
Y2 Y5: library part NX5032GA-16.000000MHZ-LN-CD-1, Package=None, Availability=Unavailable, MP=NX5032GA-16.000000MHZ-LN-CD-1, Price=None

## Nets (pads, with @x,y where several pads share a name; then routed paths per layer and width w, separated by ;. In a path a pad name is that pad's centre, name@x,y a point inside that pad or via, vN(x,y) a via of type N, cw(c..) or ccw(c..) an arc to the next point about the centre after c; other vN are vias at no path point)
3.3V: C1.1 C15.2 C17.1 C19.2 C20.1 C21.2 U2.2 U2.11 U2.26 U2.37 U2.42 U2.54
+3.3V: J1&3.1 R19.2 R21.1 R22.1 R27.2 U2.45 U8.1
+ICDI_VBUS: J11.1 R24.1 SW3.6
+MCU_PWR: R18.1 R23.1 R28.1 R31.2
+USB_VBUS: J9.1 R29.2 SW3.1 SW3.4
+VBUS: C14.1 D1.2 J1&3.11 SW3.2 SW3.5 U8.5 U8.8
GND: C1.2 C2.2 C3.1 C4.2 C5.1 C6.2 C8.1 C9.2 C10.2 C11.2 C12.2 C14.2 C15.1 C17.2 C18.1 C19.1 C20.2 C21.1 C22.2 C23.2 C24.2 C25.1 C26.1 C31.1 C32.1 D4.1 J1&3.12 J2&4.1 J5.3 J5.5 J5.9 J9.5 J11.5 Q1.2 Q2.2 Q3.2 R14.1 R16.1 RESET.A SW1.B SW2.B U1.3 U1.12 U1.27 U1.39 U1.55 U2.3 U2.12 U2.27 U2.32 U2.34 U2.35 U2.39 U2.55 U2.64 U8.4 U8.9
NetC2_1: C2.1 C9.1 C23.1 C24.1 U2.25 U2.56
NetC3_2: C3.2 C4.1 C5.2 C6.1 C8.2 U1.2 U1.11 U1.26 U1.37 U1.42 U1.54
NetC10_1: C10.1 C11.1 C12.1 C22.1 U1.25 U1.56
NetC18_2: C18.2 U8.3
NetC25_2: C25.2 R20.1 Y5.1
NetC26_2: C26.2 U2.40 Y5.2
NetC28_1: C28.1 U1.34 Y1.1
NetC28_2: C28.2 C29.1 U1.35
NetC29_2: C29.2 U1.36 Y1.2
NetC31_2: C31.2 U1.40 Y2.1
NetC32_2: C32.2 R26.1 Y2.2
NetD1_1: D1.1 R5.2
NetD1_3: D1.3 R3.2
NetD1_4: D1.4 R4.2
NetD4_2: D4.2 R27.1
NetJ1&3_2: J1&3.2 U1.57
NetJ1&3_3: J1&3.3 R25.1 U1.45
NetJ1&3_4: J1&3.4 R29.1 U1.46
NetJ1&3_5: J1&3.5 U1.59
NetJ1&3_6: J1&3.6 U1.60
NetJ1&3_7: J1&3.7 U1.58
NetJ1&3_8: J1&3.8 U1.22
NetJ1&3_9: J1&3.9 U1.23
NetJ1&3_10: J1&3.10 U1.24
NetJ1&3_13: J1&3.13 R9.1 U1.61
NetJ1&3_14: J1&3.14 R10.1 U1.62
NetJ1&3_15: J1&3.15 U1.63
NetJ1&3_16: J1&3.16 U1.64
NetJ1&3_17: J1&3.17 U1.8
NetJ1&3_18: J1&3.18 U1.7
NetJ1&3_19: J1&3.19 U1.6
NetJ1&3_20: J1&3.20 R2.1 U1.29
NetJ2&4_2: J2&4.2 U1.47
NetJ2&4_3: J2&4.3 U1.9
NetJ2&4_4: J2&4.4 R1.1 U1.28
NetJ2&4_5: J2&4.5 R28.2 RESET.B U1.38 U2.23
NetJ2&4_6: J2&4.6 R10.2 U1.4
NetJ2&4_7: J2&4.7 R9.2 U1.1
NetJ2&4_8: J2&4.8 U1.21
NetJ2&4_9: J2&4.9 U1.20
NetJ2&4_10: J2&4.10 U1.19
NetJ2&4_11: J2&4.11 R11.1 U1.30
NetJ2&4_12: J2&4.12 R12.1 U1.31
NetJ2&4_13: J2&4.13 U1.48
NetJ2&4_14: J2&4.14 U1.16
NetJ2&4_15: J2&4.15 U1.15
NetJ2&4_16: J2&4.16 U1.14
NetJ2&4_17: J2&4.17 U1.13
NetJ2&4_18: J2&4.18 U1.53
NetJ2&4_19: J2&4.19 U1.10
NetJ2&4_20: J2&4.20 R13.1 U1.5
NetJ5_2: J5.2 U2.51
NetJ5_4: J5.4 R21.2 R22.2 U2.52
NetJ5_6: J5.6 U2.49
NetJ5_8: J5.8 U2.50
NetJ5_10: J5.10 R19.1 U2.38
NetJ9_2: J9.2 U1.44
NetJ9_3: J9.3 U1.43
NetJ9_4: J9.4 R25.2
NetJ9_Shell: J9.Shell R14.2
NetJ11_2: J11.2 U2.43
NetJ11_3: J11.3 U2.44
NetJ11_Shell: J11.Shell R16.2
NetQ1_1: Q1.1 R2.2
NetQ1_3: Q1.3 R3.1
NetQ2_1: Q2.1 R12.2
NetQ2_3: Q2.3 R4.1
NetQ3_1: Q3.1 R11.2
NetQ3_3: Q3.3 R5.1
NetR1_2: R1.2 R8.2 SW2.A
NetR8_1: R8.1 R31.1 U1.32
NetR13_2: R13.2 SW1.A
NetR18_2: R18.2 U1.51 U2.20 U2.29
NetR20_2: R20.2 U2.41
NetR23_2: R23.2 U1.52 U2.19 U2.30
NetR24_2: R24.2 U2.46
NetR26_2: R26.2 U1.41
NetU1_17: U1.17 U2.18
NetU1_18: U1.18 U2.17
NetU1_49: U1.49 U2.21 U2.53
NetU1_50: U1.50 U2.22
pads on no net: J5. J5.1 J5.7 J9.MH1 J9.MH2 J11.4 J11.MH1 J11.MH2 RESET.A' RESET.B' SW1.A' SW1.B' SW2.A' SW2.B' SW3.3 U1.33 U2.1 U2.4 U2.5 U2.6 U2.7 U2.8 U2.9 U2.10 U2.13 U2.14 U2.15 U2.16 U2.24 U2.28 U2.31 U2.33 U2.36 U2.47 U2.48 U2.57 U2.58 U2.59 U2.60 U2.61 U2.62 U2.63 U8.2 U8.6 U8.7

## Text inside footprints (layer, text, board x,y; h text height)
J9: Top 3D Body "PCB Edge" at -0.887,46.131 h0.75 r270
J11: Top 3D Body "PCB Edge" at 18.191,65.657 h0.75 r180